# EAGLE board C9 (EAGLE 7.5.0)
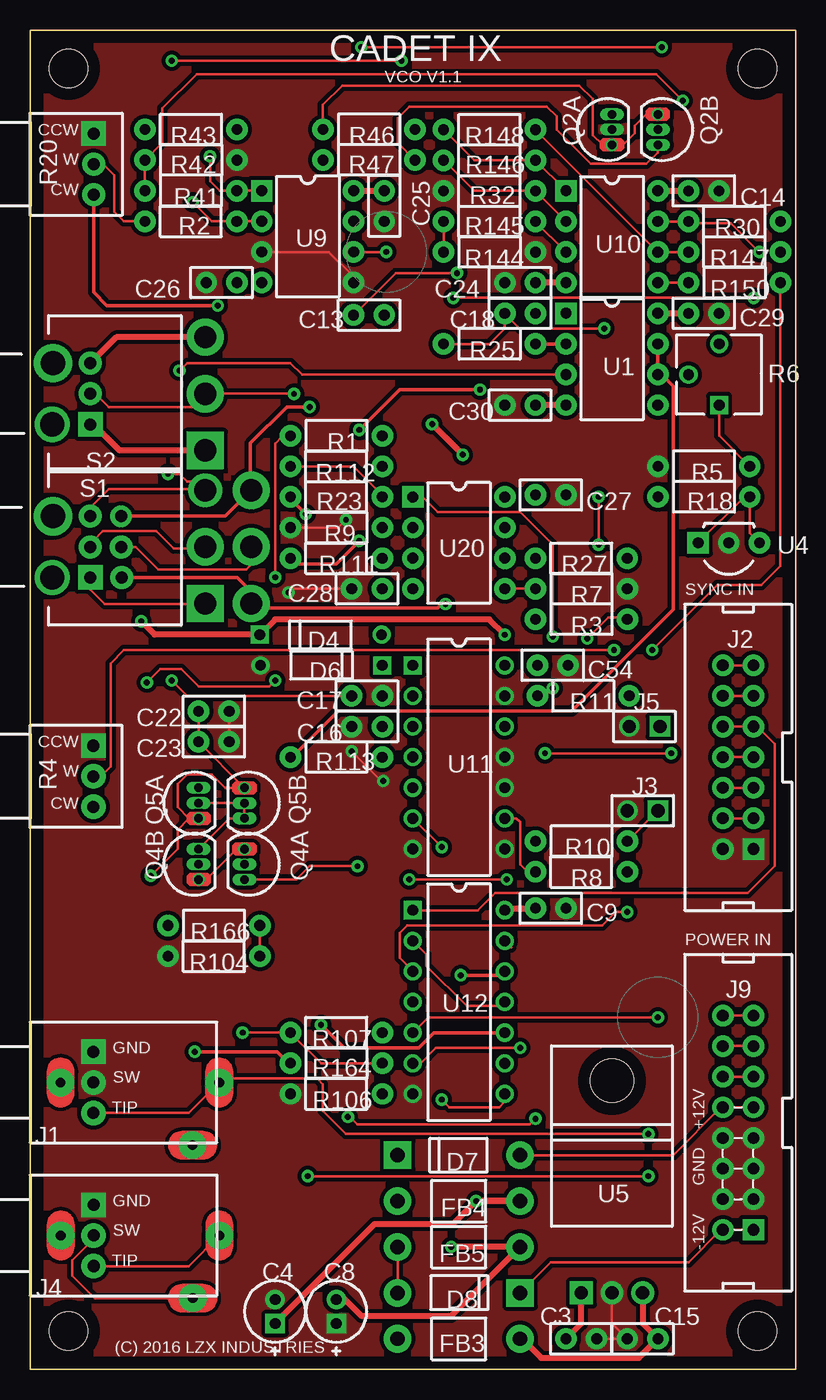
[diagram p0: board, top side]
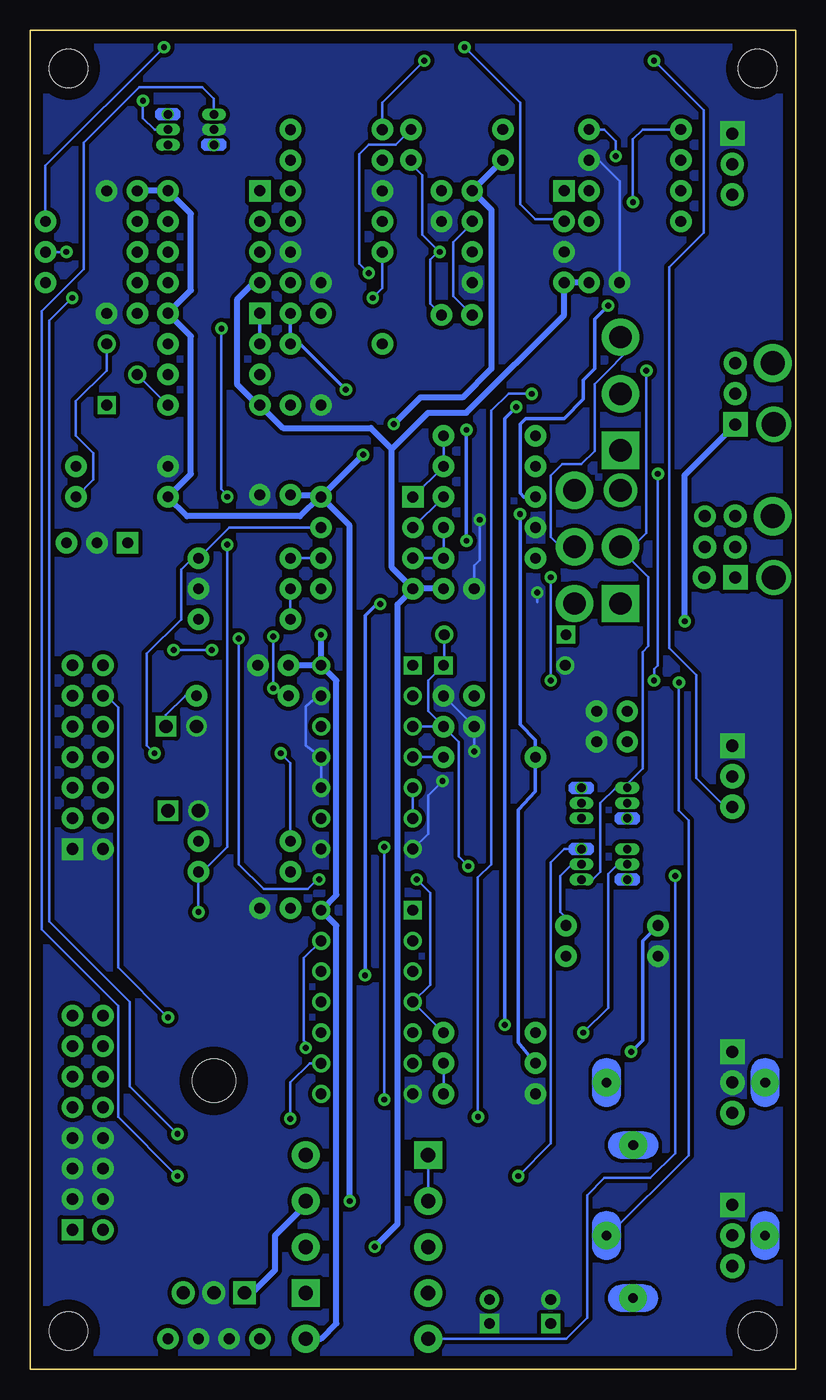
[diagram p1: board, bottom side, seen from below]

Size 63.5 x 111.12 mm. Coordinates in mm from the lower left corner, seen from the top.
Outline: 0,0 63.5,0 63.5,111.12 0,111.12 0,0
Copper layers (1*16): Top 0.035mm / dielectric 1.5mm / Bottom 0.035mm
Design rules "default *": minimum track width 10mil, minimum drill 0.61mm, track to track 8mil, track to pad 8mil, pad to pad 8mil, via to via 8mil, smd to smd 8mil, copper to edge 40mil, drill to drill 8mil, minimum pad ring 0mil, minimum via ring 8mil, stop-mask expansion 2mil, vias tented up to drill 19mil, thermal gap 10mil
Net classes: 0 Default: width 0.203 mm, clearance 0.229 mm, clearance 0.229 mm to class 1, clearance 0.229 mm to class 2; 1 Power Rails: width 0.508 mm, clearance 0.203 mm, clearance 0.203 mm to class 0, clearance 0.203 mm to class 2; 2 V Refs & Syncs: width 0.305 mm, clearance 0.229 mm, clearance 0.229 mm to class 0, clearance 0.229 mm to class 1
Holes 3.17 mm at 3.17,3.17 3.17,107.95 60.33,3.18 60.33,107.96

## Footprints (pad centres in the part's own frame; a part is rotated, then mirrored left to right if it is on the bottom)
CAP-2.54/6.6x3 = drill 0.889 pad 1.778: 1 -1.27,0; 2 1.27,0
CAPPR-2/5.08 = drill 0.9 pad 1.6 square: 1 -0.991,0 | drill 0.9 pad 1.6: 2 0.991,0
CAP-2.54/6.6x3_C9 = drill 0.889 pad 1.778: 1 -1.27,0; 2 1.27,0
CAP-2.54/6.6x3_C13 = drill 0.889 pad 1.778: 1 -1.27,0; 2 1.27,0
CAP-2.54/6.6x3_C14 = drill 0.889 pad 1.778: 1 -1.27,0; 2 1.27,0
CAP-2.54/6.6x3_C15 = drill 0.889 pad 1.778: 1 -1.27,0; 2 1.27,0
CAP-2.54/6.6x3_C16 = drill 0.889 pad 1.778: 1 -1.27,0; 2 1.27,0
CAP-2.54/6.6x3_C24 = drill 0.889 pad 1.778: 1 -1.27,0; 2 1.27,0
CAP-2.54/6.6x3_C25 = drill 0.889 pad 1.778: 1 -1.27,0; 2 1.27,0
CAP-2.54/6.6x3_C28 = drill 0.889 pad 1.778: 1 -1.27,0; 2 1.27,0
DO-35 = drill 0.9 pad 1.5 square: 1 -5.05,0 | drill 0.9 pad 1.5: 2 5.05,0
DO-35_D6 = drill 0.9 pad 1.5 square: 1 -5.05,0 | drill 0.9 pad 1.5: 2 5.05,0
DO-41 = drill 1.2 pad 2.286 square: 1 -5.08,0 | drill 1.2 pad 2.286: 2 5.08,0
DO-41_D8 = drill 1.2 pad 2.286 square: 1 -5.08,0 | drill 1.2 pad 2.286: 2 5.08,0
FB-10.16/4.45x3.5 = drill 1.194 pad 2.286: 1 -5.08,0; 2 5.08,0
PJ302M = drill 0.8 pad 2.286: 1A 2.54,0; 2A 13.487,-5.207; 3A 15.697,0 | drill 1 pad 2.032 square: 1B 5.258,2.54 | drill 1 pad 2.032: 2B 5.258,0; 3B 5.258,-2.54
IDC14M = drill 0.965 pad 1.778 square: 1 7.62,1.27 | drill 0.965 pad 1.778: 2 7.62,-1.27; 3 5.08,1.27; 4 5.08,-1.27; 5 2.54,1.27; 6 2.54,-1.27; 7 0,1.27; 8 0,-1.27; 9 -2.54,1.27; 10 -2.54,-1.27; 11 -5.08,1.27; 12 -5.08,-1.27; 13 -7.62,1.27; 14 -7.62,-1.27
HDR-2x1T/2.54x2.54/3x5 = drill 1.1 pad 1.7 square: 1 0,-1.27 | drill 1.1 pad 1.7: 2 0,1.27
PJ302M_J4 = drill 0.8 pad 2.286: 1A 2.54,0; 2A 13.487,-5.207; 3A 15.697,0 | drill 1 pad 2.032 square: 1B 5.258,2.54 | drill 1 pad 2.032: 2B 5.258,0; 3B 5.258,-2.54
IDC16M = drill 0.965 pad 1.778 square: 1 8.89,1.27 | drill 0.965 pad 1.778: 2 8.89,-1.27; 3 6.35,1.27; 4 6.35,-1.27; 5 3.81,1.27; 6 3.81,-1.27; 7 1.27,1.27; 8 1.27,-1.27; 9 -1.27,1.27; 10 -1.27,-1.27; 11 -3.81,1.27; 12 -3.81,-1.27; 13 -6.35,1.27; 14 -6.35,-1.27; 15 -8.89,1.27; 16 -8.89,-1.27
TO-92 = drill 0.7 pad 1: 1 -1.27,0 | drill 0.7 pad 1 long: 2 0,0; 3 1.27,0
TO-92_Q2B = drill 0.7 pad 1: 1 -1.27,0 | drill 0.7 pad 1 long: 2 0,0; 3 1.27,0
TO-92_Q5A = drill 0.7 pad 1: 1 -1.27,0 | drill 0.7 pad 1 long: 2 0,0; 3 1.27,0
TO-92_Q5B = drill 0.7 pad 1: 1 -1.27,0 | drill 0.7 pad 1 long: 2 0,0; 3 1.27,0
RES-7.62/5.1x2.5 = drill 0.889 pad 1.778: 1 -3.81,0; 2 3.81,0
RES-7.62/5.1x2.5_R2 = drill 0.889 pad 1.778: 1 -3.81,0; 2 3.81,0
ALPHA9H = drill 1 pad 2.032 square: 1 5.258,2.54 | drill 1 pad 2.032: 2 5.258,0; 3 5.258,-2.54
3362P = drill 0.9 pad 1.5 square: 1 -1.27,2.54 | drill 0.9 pad 1.5: 2 1.27,0; 3 -1.27,-2.54
ALPHA9H_R20 = drill 1 pad 2.032 square: 1 5.258,2.54 | drill 1 pad 1.905: 2 5.258,0; 3 5.258,-2.54
7201-A = drill 1.85 pad 3.1 square: 1 -4.7,-14.528 | drill 1 pad 2.032 square: 1B -2.54,-5 | drill 1.85 pad 3.1: 2 0,-14.528; 4 -4.7,-18.338; 5 0,-18.338; 6 4.7,-18.338 | drill 1 pad 1.905: 2B 0,-5; 3B 2.54,-5; 4B -2.54,-7.584; 5B 0,-7.54 | drill 1.85 pad 2.794: 3 4.7,-14.528 | drill 1 pad 1.778: 6B 2.54,-7.54 | drill 2 pad 3.175: 7 2.54,-1.894 | drill 2 pad 2.921: 8 -2.54,-1.828
7201-SPST = drill 1.85 pad 3.1 square: 1 -4.7,-14.528 | drill 1 pad 2.032 square: 1B -2.54,-5 | drill 1.85 pad 3.1: 2 0,-14.528; 3 4.7,-14.528 | drill 1 pad 1.905: 2B 0,-5; 3B 2.54,-5 | drill 2 pad 3.175: 7 2.54,-1.894 | drill 2 pad 2.921: 8 -2.54,-1.828
DIP-8 = drill 0.9 pad 1.778 square: 1 -3.81,3.81 | drill 0.9 pad 1.778: 2 -3.81,1.27; 3 -3.81,-1.27; 4 -3.81,-3.81; 5 3.81,-3.81; 6 3.81,-1.27; 7 3.81,1.27; 8 3.81,3.81
TO-92-100R = drill 0.889 pad 1.778 square: 1 2.54,0 | drill 0.889 pad 1.778: 2 0,0; 3 -2.54,0
TO-220H = drill 1.1 pad 1.9 square: 1 -2.54,0 | drill 1.1 pad 1.9: 2 0,0; 3 2.54,0 | hole 3.6: 0,17.6
DIP-8_U9 = drill 0.9 pad 1.778 square: 1 -3.81,3.81 | drill 0.9 pad 1.778: 2 -3.81,1.27; 3 -3.81,-1.27; 4 -3.81,-3.81; 5 3.81,-3.81; 6 3.81,-1.27; 7 3.81,1.27; 8 3.81,3.81
DIP-14 = drill 0.9 pad 1.5 square: 1 -3.81,7.62 | drill 0.9 pad 1.5: 2 -3.81,5.08; 3 -3.81,2.54; 4 -3.81,0; 5 -3.81,-2.54; 6 -3.81,-5.08; 7 -3.81,-7.62; 8 3.81,-7.62; 9 3.81,-5.08; 10 3.81,-2.54; 11 3.81,0; 12 3.81,2.54; 13 3.81,5.08; 14 3.81,7.62
DIP-14_U12 = drill 0.9 pad 1.5 square: 1 -3.81,7.62 | drill 0.9 pad 1.5: 2 -3.81,5.08; 3 -3.81,2.54; 4 -3.81,0; 5 -3.81,-2.54; 6 -3.81,-5.08; 7 -3.81,-7.62; 8 3.81,-7.62; 9 3.81,-5.08; 10 3.81,-2.54; 11 3.81,0; 12 3.81,2.54; 13 3.81,5.08; 14 3.81,7.62

## Placement (x,y rotation side)
C3  330n  [CAP-2.54/6.6x3]  45.72,2.54 0 top
C4  10u 25V  [CAPPR-2/5.08]  20.32,4.8 90 top
C8  10u 25V  [CAPPR-2/5.08]  25.4,4.8 90 top
C9  100n  [CAP-2.54/6.6x3_C9]  43.18,38.26 0 top
C13  100p  [CAP-2.54/6.6x3_C13]  28.1,87.48 180 top
C14  100n  [CAP-2.54/6.6x3_C14]  55.88,97.79 0 top
C15  100n  [CAP-2.54/6.6x3_C15]  50.8,2.54 180 top
C16  150pF  [CAP-2.54/6.6x3_C16]  27.94,53.34 0 top
C17  47nF  [CAP-2.54/6.6x3_C13]  27.94,55.88 180 top
C18  15pF  [CAP-2.54/6.6x3_C16]  40.64,87.63 0 top
C22  1uF  [CAP-2.54/6.6x3_C16]  15.24,54.61 0 top
C23  1000pF  [CAP-2.54/6.6x3_C16]  15.24,52.07 0 top
C24  100n  [CAP-2.54/6.6x3_C24]  40.64,90.17 0 top
C25  100n  [CAP-2.54/6.6x3_C25]  29.37,96.53 270 top
C26  100n  [CAP-2.54/6.6x3_C24]  15.88,90.18 0 top
C27  100n  [CAP-2.54/6.6x3_C14]  43.18,72.56 0 top
C28  100n  [CAP-2.54/6.6x3_C28]  27.94,64.77 0 top
C29  100n  [CAP-2.54/6.6x3_C14]  55.88,87.63 0 top
C30  100n  [CAP-2.54/6.6x3_C16]  40.64,80.01 0 top
C54  100n  [CAP-2.54/6.6x3_C14]  43.34,58.43 0 top
D4  1N4148  [DO-35]  24.1,60.96 0 top
D6  1N4148  [DO-35_D6]  24.16,58.42 180 top
D7  1N4001  [DO-41]  35.56,17.78 0 top
D8  1N4001  [DO-41_D8]  35.56,6.35 180 top
FB3  68R  [FB-10.16/4.45x3.5]  35.56,2.54 0 top
FB4  68R  [FB-10.16/4.45x3.5]  35.56,13.97 0 top
FB5  68R  [FB-10.16/4.45x3.5]  35.56,10.16 0 top
J1  PJ302M  [PJ302M]  -0.01,23.81 0 top
J2  LZXSYNC14  [IDC14M]  58.72,50.8 270 top
J3  90131-0121  [HDR-2x1T/2.54x2.54/3x5]  50.81,46.36 90 top
J4  PJ302M  [PJ302M_J4]  0,11.11 0 top
J5  90131-0121  [HDR-2x1T/2.54x2.54/3x5]  50.96,53.35 90 top
J9  2X8 PIN HEADER  [IDC16M]  58.72,20.47 270 top
Q2A  2N3904  [TO-92]  48.26,102.87 90 top
Q2B  2N3904  [TO-92_Q2B]  52.07,102.87 270 top
Q4A  2N3904  [TO-92_Q2B]  17.78,41.91 270 top
Q4B  2N3904  [TO-92]  13.97,41.91 90 top
Q5A  2N3906  [TO-92_Q5A]  13.97,46.99 90 top
Q5B  2N3906  [TO-92_Q5B]  17.78,46.99 270 top
R1  499R  [RES-7.62/5.1x2.5]  25.4,77.47 180 top
R2  16.5K  [RES-7.62/5.1x2.5_R2]  13.34,95.26 0 top
R3  4.02K  [RES-7.62/5.1x2.5]  45.72,62.24 180 top
R4  B10K  [ALPHA9H]  -0.01,49.21 0 top
R5  10K  [RES-7.62/5.1x2.5]  55.88,74.93 180 top
R6  10K  [3362P]  55.88,82.55 180 top
R7  1K  [RES-7.62/5.1x2.5]  45.72,64.78 180 top
R8  4.02K  [RES-7.62/5.1x2.5_R2]  45.73,41.28 0 top
R9  1K  [RES-7.62/5.1x2.5]  25.4,69.85 180 top
R10  499R  [RES-7.62/5.1x2.5]  45.72,43.82 180 top
R11  499R  [RES-7.62/5.1x2.5]  45.88,55.89 180 top
R18  4.99K  [RES-7.62/5.1x2.5]  55.88,72.39 180 top
R20  B10K  [ALPHA9H_R20]  0,100 0 top
R23  1K  [RES-7.62/5.1x2.5_R2]  25.4,72.39 0 top
R25  4.02K  [RES-7.62/5.1x2.5]  38.1,85.09 180 top
R27  1K  [RES-7.62/5.1x2.5_R2]  45.72,67.31 0 top
R30  16.5K  [RES-7.62/5.1x2.5_R2]  58.42,95.25 0 top
R32  1K  [RES-7.62/5.1x2.5_R2]  38.1,97.79 0 top
R41  100R  [RES-7.62/5.1x2.5]  13.34,97.8 180 top
R42  75R  [RES-7.62/5.1x2.5]  13.34,100.34 180 top
R43  2K TempCo 3300ppm  [RES-7.62/5.1x2.5_R2]  13.34,102.88 0 top
R46  8.25K  [RES-7.62/5.1x2.5]  28.1,102.88 180 top
R47  1.2M  [RES-7.62/5.1x2.5]  28.1,100.34 180 top
R104  1K  [RES-7.62/5.1x2.5_R2]  15.24,34.29 0 top
R106  2.05K  [RES-7.62/5.1x2.5_R2]  25.4,22.86 0 top
R107  49.9K  [RES-7.62/5.1x2.5_R2]  25.4,27.94 0 top
R111  1K  [RES-7.62/5.1x2.5_R2]  25.4,67.31 0 top
R112  1K  [RES-7.62/5.1x2.5_R2]  25.4,74.93 0 top
R113  75R  [RES-7.62/5.1x2.5]  25.4,50.8 180 top
R144  100K  [RES-7.62/5.1x2.5]  38.1,92.71 180 top
R145  499R  [RES-7.62/5.1x2.5_R2]  38.1,95.25 0 top
R146  1K  [RES-7.62/5.1x2.5_R2]  38.1,100.33 0 top
R147  4.99K  [RES-7.62/5.1x2.5_R2]  58.42,92.71 0 top
R148  4.99K  [RES-7.62/5.1x2.5_R2]  38.1,102.87 0 top
R150  499R  [RES-7.62/5.1x2.5]  58.42,90.17 180 top
R164  2.21K  [RES-7.62/5.1x2.5]  25.4,25.4 180 top
R166  1K  [RES-7.62/5.1x2.5]  15.24,36.83 180 top
S1  7201MD9ABE  [7201-A]  0,68.25 90 top
S2  10TF230-DIY  [7201-SPST]  0,80.95 90 top
U1  TL072P  [DIP-8]  48.26,83.82 0 top
U4  TL431  [TO-92-100R]  57.95,68.59 180 top
U5  7805  [TO-220H]  48.26,6.35 0 top
U9  TL072  [DIP-8_U9]  23.02,93.99 0 top
U10  LM6172  [DIP-8]  48.26,93.98 0 top
U11  CD4066BCN  [DIP-14]  35.56,50.8 0 top
U12  74HC14  [DIP-14_U12]  35.56,30.48 0 top
U20  LM6172  [DIP-8]  35.56,68.58 0 top

## Library data of the parts
C3 C4 C8 C9 C13-C18 C22-C30 C54 D7 D8 J2 J9 Q2A Q2B Q4A Q4B Q5A Q5B R1-R3 R5 R7-R11 R18 R23 R25 R27 R30 R32 R41-R43 R46 R47 R104 R106 R107 R111-R113 R144-R148 R150 R164 R166 S2 = common
D4 D6 = common; DATASHEET: http://datasheets.diptrace.com\fairchild\1N4148.pdf; MANUFACTURER: Fairchild
FB3-FB5 = common; MANUFACTURER: Fair-Rite
J1 J4 = common; DATASHEET: http://www.thonk.co.uk/shop/pj302m/
J3 J5 = common; DATASHEET: http://datasheets.diptrace.com/con_headers/901310126_sd.pdf; MANUFACTURER: Molex
R4 R20 = common; DATASHEET: http://www.thonk.co.uk/shop/alpha-9mm-pots/; MANUFACTURER: Alpha
R6 = common; DATASHEET: http://datasheets.diptrace.com/potentiometers/bourns_trimpot_catalog.pdf; MANUFACTURER: Bourns
S1 = common; DATASHEET: http://datasheets.diptrace.com/switches/7000_series.pdf; MANUFACTURER: C&K
U1 = common; DATASHEET: http://datasheets.diptrace.com\ti\TL07x.pdf; MANUFACTURER: Texas Instruments
U4 = common; DATASHEET: http://datasheets.diptrace.com\st_micro\CD00000986.pdf; MANUFACTURER: ST Microelectronics
U5 = common; MANUFACTURER: Atmel
U9 U10 U20 = common; DATASHEET: http://www.ti.com/lit/gpn/lm6172; MANUFACTURER: Texas Instruments
U11 = common; DATASHEET: http://datasheets.diptrace.com/fairchild/CD4066BC.pdf; MANUFACTURER: Fairchild
U12 = common; MANUFACTURER: National Semiconductor

## Nets
0V: C3.2 C4.2 C8.1 C9.2 C14.2 C15.2 C16.1 C17.1 C22.2 C23.2 C24.1 C25.2 C26.1 C27.2 C28.1 C29.2 C30.1 C54.2 D6.2 J1.1A J1.1B J1.2A J1.2B J2.1 J2.2 J3.2 J4.1A J4.1B J5.2 J9.3 J9.4 J9.5 J9.6 J9.7 J9.8 Q2A.2 R4.1 R5.2 R7.1 R9.2 R20.1 R32.1 R42.1 R104.1 R106.1 R144.1 U4.2 U5.2 U9.3 U9.5 U11.7 U11.8 U11.10 U11.11 U11.13 U12.7
2V_REF [V Refs & Syncs]: R20.3 R23.1 R113.2 R164.2 R166.2 U1.6 U1.7
+5V [Power Rails]: C9.1 C15.1 C54.1 D4.1 FB3.2 S2.1 S2.1B U5.3 U11.14 U12.14
+12V [Power Rails]: C3.1 C4.1 C14.1 C25.1 C27.1 C29.1 FB4.2 R18.2 R47.2 U1.8 U5.1 U9.8 U10.8 U20.8
-12V [Power Rails]: C8.2 C24.2 C26.2 C28.2 C30.2 FB5.2 U1.4 U9.4 U10.4 U20.4
_HSYNC [V Refs & Syncs]: S1.4 S1.4B U12.12
_VSYNC [V Refs & Syncs]: S1.6 S1.6B U12.10
EXPO_CONVERTER_OUT: Q2A.3 Q4A.1 Q4B.1
Net_0: J4.3A J4.3B R1.2
Net_1: R6.3 R18.1 U4.1 U4.3
Net_2: U12.6 U12.13
Net_3: R2.1 R20.2
Net_4: J2.11 J2.12 U12.5
Net_5: R9.1 R111.2 U20.3
Net_6: R8.1 U11.9
Net_7: R3.2 R7.2 U20.5
Net_8: J3.1 R10.1
Net_9: R4.2 R150.1
Net_10: S1.1 S1.1B
Net_11: J9.11 J9.12
Net_12: R4.3 R146.2 R148.1 U10.1
Net_13: D8.2 FB5.1
Net_14: J9.15 J9.16
Net_15: J2.7 J2.8
Net_16: R5.1 R6.1
Net_17: D7.1 FB4.1
Net_18: D8.1 J9.1 J9.2
Net_19: R10.2 R27.2 U20.7
Net_20: D7.2 J9.9 J9.10
Net_21: R6.2 U1.5
Net_36: J5.1 R11.1
Net_39: C13.1 Q2B.3 R47.1 U9.6
Net_45: Q2A.1 Q2B.1 R46.2
Net_46: R2.2 R30.2 R43.1 U9.2
Net_48: R41.1 R43.2 U9.1
Net_49: Q2B.2 R41.2 R42.2
Net_51: C13.2 R46.1 U9.7
Net_56: J2.9 J2.10 U12.1
Net_57: J4.2A J4.2B
Net_58: U12.2 U12.11
Net_59: C17.2 S1.3 S1.3B
Net_60: J9.13 J9.14
Net_61: S1.5 S1.5B S2.3 S2.3B
Net_62: U11.5 U11.6 U12.8
Net_63: J2.13 J2.14
Net_64: J2.5 J2.6
Net_65: J2.3 J2.4
Net_72: R145.2 U10.3
Net_79: Q4B.3 Q5A.2 Q5B.2 Q5B.3
Net_81: Q4A.2 R104.2 R166.1
Net_83: J1.3A J1.3B R144.2 R145.1
Net_85: Q4B.2 R106.2 R107.1 R164.1
Net_101: R23.2 R112.1 U20.2
Net_103: C22.1 C23.1 FB3.1 Q5A.1 Q5B.1
Net_110: R150.2 U10.5
Net_114: R32.2 R146.1 U10.2
Net_126: R147.1 R148.2 U10.6
Net_178: R27.1 U20.6
PROCESSOR_IN: R1.1 R11.2 R112.2 U20.1
SYNC_SELECT: S2.2 S2.2B U12.9
SYNC_SWITCH_REFERENCE: R113.1 U11.4
U7_+IN: C18.1 R8.2 R25.2 U12.3
VC_FM: R30.1 R147.2 U10.7
VCO_CORE_BUFFERED [V Refs & Syncs]: C18.2 R25.1 R111.1 U1.1 U1.2
VCO_CORE_SQUARE: R3.1 R107.2 U12.4
VCO_CORE_UNBUFFERED: C16.2 D4.2 D6.1 Q4A.3 Q5A.3 S1.2 S1.2B U1.3 U11.3

## Tracks (layer width: path | path; a pad name or v marks a point on that pad's centre or on a via)
0V  (via drill 0.49 pad 1.02)
  Top 0.203: U9.3 24.77,92.72 26.83,90.66 U9.5 | C3.2 C15.2 48.26,3.81 U5.2 | C3.2 | C22.2 C23.2 | v29.29,48.82 29.21,48.74 v26.67,51.28 | R9.2 25.55,69.85 v26.2,70.49 | C28.1 21.74,64.77 v21.43,64.46
  Bottom 0.203: C26.1 14.61,98.59 16.35,100.34 R42.1 | C17.1 C16.1 | C16.1 | U11.10 U11.11 40.64,51.75 40.64,55 39.37,56.11 U11.13 | U11.7 30.48,44.45 30.48,47.63 v29.29,48.82 | v26.67,51.28 C16.1 | v26.2,70.49 26.2,67.16 26.67,66.68 C28.1 | v21.43,64.46 21.43,63.66
  pour Top (isolate 0.33): 0.83,0.83 62.67,0.83 62.67,110.3 0.83,110.3
  pour Bottom (isolate 0.33): 0.83,0.83 62.67,0.83 62.67,110.3 0.83,110.3
2V_REF  (via drill 0.49 pad 1.02)
  Top 0.305: U1.7 U1.6 51.44,82.55 51.6,82.72 52.23,82.72 53.35,81.61 53.35,63.03 44.92,54.61 25.56,54.61 21.59,50.64 R113.2 20.95,50.8 | R164.2 21.59,25.25 20.48,26.36 v13.65,26.36 | R23.1 21.44,72.39 v22.86,70.97 | R20.3 5.26,89.37 6.35,88.27 v15.56,88.27
  Bottom 0.305: v13.65,26.36 12.7,27.31 12.7,35.56 R166.2 | R164.2 23.02,27.15 23.02,46.41 21.59,47.94 R113.2 21.59,52.23 22.86,53.5 v22.86,70.97 | v15.56,88.27 16.67,87.16 16.67,83.03 17.62,82.08 17.62,80.5 19.21,78.91 22.39,78.91 22.86,78.43 22.86,72.72 22.54,72.39 R23.1
+5V  (via drill 0.49 pad 1.02)
  Top 0.508: U5.3 50.8,3.81 C15.1 50.48,0.95 42.39,0.95 40.8,2.54 FB3.2 | U12.14 39.53,38.26 C9.1 | v39.37,60.96 38.1,62.23 20.32,62.23 D4.1 10.33,60.96 v9.21,62.08 | S2.1 7.42,76.25 5.72,77.95 5.72,79.12 S2.1B
  Bottom 0.508: U11.14 C54.1 | FB3.2 39.37,2.54 38.1,3.81 38.1,36.83 U12.14 38.1,39.37 38.1,57.15 U11.14 | U11.14 v39.37,60.96 | v9.21,62.08 9.21,74.2 S2.1B
+12V  (via drill 0.49 pad 1.02)
  Top 0.508: U10.8 C14.1 | C14.1 | U1.8 C29.1 | C29.1 | C3.1 45.72,3.81 U5.1 | C4.1 28.57,12.06 35.09,12.06 v36.99,13.97 FB4.2 v36.99,13.97 | v33.34,78.43 v35.88,75.89 | v35.88,75.89 | U9.8 C25.1 | C25.1
  Bottom 0.508: C27.1 39.37,72.56 U20.8 | v36.99,13.97 36.99,70.01 U20.8 | U20.8 39.21,72.39 | C14.1 U10.8 50.17,95.89 50.17,89.53 U1.8 50.16,85.72 50.16,74.3 R18.2 50.48,70.8 41.12,70.8 39.53,72.39 U20.8 | C14.1 | 23.97,100.34 R47.2 U9.8 25.24,96.21 25.24,83.03 27.63,80.64 31.13,80.64 v33.34,78.43 | U5.1 45.09,6.35 43.18,8.26 43.18,11.11 40.32,13.97 FB4.2 | v35.88,75.89 39.37,72.4 U20.8 | 42.07,72.56 C27.1 | C27.1
-12V  (via drill 0.49 pad 1.02)
  Top 0.508: U10.4 C24.2 | C24.2 | U1.4 C30.2 | C30.2 | C8.2 25.56,5.79 25.56,6.35 27.47,4.45 34.92,4.45 FB5.2 v34.92,10.16
  Bottom 0.508: C28.2 U20.4 | U20.4 | C26.2 U9.4 19.21,87.48 27.32,79.38 30.49,79.38 33.5,76.37 | v34.92,10.16 33.02,12.06 33.02,63.5 U20.4 | U20.4 33.5,66.52 33.5,76.37 | U10.4 44.94,90.17 46.36,88.75 46.36,81.76 44.6,80.01 U1.4 42.55,78.11 35.24,78.11 33.5,76.37
_HSYNC  (via drill 0.49 pad 1.02)
  Top 0.305: S1.4B 17.17,65.71 18.34,64.54 S1.4 18.7,63.19 33.82,63.19 34.13,63.51 v34.45,63.51 | U12.12 39.37,32.7 v35.72,32.7
  Bottom 0.305: v35.72,32.7 35.72,62.55 34.77,63.51 v34.45,63.51
_VSYNC  (via drill 0.49 pad 1.02)
  Top 0.305: S1.6B 16.18,70.79 S1.6 18.26,72.95 18.26,76.84 21.27,79.86 v23.18,79.86 | v24.13,28.58 26.04,26.67 32.23,26.67 33.5,27.94 U12.10
  Bottom 0.305: v23.18,79.86 24.13,78.91 v24.13,28.58
EXPO_CONVERTER_OUT  (via drill 0.49 pad 1.02)
  Top 0.203: Q4B.1 14.61,40.64 17.14,43.18 Q4A.1 | v23.02,16.04 v51.28,16.04
  Bottom 0.203: Q4A.1 19.21,43.18 20.32,42.07 20.32,18.73 v23.02,16.04 | v51.28,16.04 56.2,20.96 56.2,30.17 62.55,36.52 62.55,87.8 59.06,91.29 59.06,101.77 54.46,106.37 49.22,106.37 48.26,105.42 Q2A.3
Net_0  (via drill 0.49 pad 1.02)
  Top 0.203: J4.3B 13.16,8.57 J4.3A | v9.69,57 10.8,58.11 12.54,58.11 13.97,56.68 19.85,56.68 v20.32,57.16 | v20.32,65.73 20.32,76.84 20.95,77.47 R1.2
  Bottom 0.203: J4.3A 15.56,11.11 8.89,17.78 8.89,45.56 9.69,46.36 v9.69,57 | v20.32,57.16 v20.32,65.73
Net_1
  Top 0.203: U4.1 59.21,72.39 R18.1 59.69,69.39 U4.3
  Bottom 0.203: R6.3 57.15,82.88 59.7,80.34 59.7,77.48 58.27,76.05 58.27,73.81 R18.1
Net_2  (via drill 0.49 pad 1.02)
  Top 0.203: U12.13 39.91,35.02 | U12.6 32.39,25.4 33.66,26.67 v40.64,26.67
  Bottom 0.203: v40.64,26.67 40.64,27.15 40.8,27.31 40.8,34.13 U12.13
Net_3
  Top 0.203: R20.2 5.26,100.02 6.03,100.02 6.99,99.07 6.99,96.05 7.78,95.26 R2.1
Net_4  (via drill 0.49 pad 1.02)
  Top 0.203: J2.12 J2.11 | v52.07,29.21 33.02,29.21 U12.5 | v52.07,29.21
  Bottom 0.203: J2.12 57.15,55.88 56.2,54.93 56.2,33.34 v52.07,29.21
Net_5
  Bottom 0.203: R9.1 R111.2 U20.3 | U20.3
Net_6
  Top 0.203: U11.9 40.33,45.72 40.64,45.41 40.64,41.91 41.28,41.28 R8.1
Net_7
  Top 0.203: U20.5 R7.2
  Bottom 0.203: R7.2 R3.2
Net_8
  Top 0.203: J3.1 | J3.1 R10.1
Net_9  (via drill 0.49 pad 1.02)
  Top 0.203: R4.2 5.87,49.21 6.67,50.01 6.67,58.58 7.79,59.7 v48.42,59.7 | v51.6,59.7 57,65.09 60.65,65.09 62.23,66.67 R150.1
  Bottom 0.203: v48.42,59.7 v51.6,59.7
Net_10
  Top 0.203: S1.1B 5,64.7 6.19,63.51 14.48,63.51 S1.1
Net_11
  Top 0.203: J9.12 J9.11
Net_12  (via drill 0.49 pad 1.02)
  Top 0.203: U10.1 R146.2 36.83,100.33 R148.1 | U10.1 | v11.75,108.6 v30.8,108.6
  Bottom 0.203: R4.3 5.86,46.67 8.26,49.06 8.26,57.63 10.48,59.85 10.48,91.45 7.62,94.31 7.62,104.47 v11.75,108.6 | v30.8,108.6 34.29,105.11 R148.1
Net_13
  Top 0.203: FB5.1 D8.2
Net_14
  Top 0.203: J9.16 J9.15
Net_15
  Top 0.203: J2.8 J2.7
Net_16
  Top 0.203: R6.1 57.15,77.47 R5.1
Net_17
  Bottom 0.203: D7.1 FB4.1
Net_18
  Top 0.203: J9.1 J9.2 57.3,11.58 54.61,8.89 43.18,8.89 D8.1
Net_19  (via drill 0.49 pad 1.02)
  Top 0.203: v53.19,51.12 v42.71,51.12
  Bottom 0.203: U20.7 46.99,69.85 R27.2 50.02,67.31 50.96,66.36 50.96,62.24 53.82,59.38 53.82,51.76 v53.19,51.12 | v42.71,51.12 41.91,50.33 R10.2
Net_20
  Top 0.203: J9.9 J9.10 57.3,21.74 53.34,17.78 D7.2
Net_21
  Bottom 0.203: U1.5 R6.2 | R6.2
Net_36
  Bottom 0.203: R11.1 50.65,55.89 52.23,54.3 J5.1
Net_39  (via drill 0.49 pad 1.02)
  Top 0.203: 52.1,101.47 | 52.1,101.47 Q2B.3 | Q2B.3 | U9.6 v29.53,92.72 | Q2B.3 52.07,100.97 51.12,100.02 46.52,100.02 43.66,102.88 43.66,103.99 42.87,104.79 31.44,104.79 30.48,103.83 30.48,101.77 R47.1
  Bottom 0.203: R47.1 32.23,100.34 30.96,99.07 30.96,94.15 v29.53,92.72 29.69,92.72 30.32,92.08 30.32,88.43 C13.1 | R47.1
Net_45
  Top 0.203: Q2B.1 51.11,104.14 50.17,103.2 50.17,102.56 49.21,101.6 Q2A.1 47.48,101.6 46.68,102.4 46.68,105.42 45.57,106.53 25.88,106.53 24.29,104.94 R46.2
Net_46  (via drill 0.49 pad 1.02)
  Top 0.203: 17.94,95.26 R2.2 15.08,95.26 v13.49,96.85 | 17.94,95.26 | 17.94,95.26 U9.2 | v52.39,109.71 v27.47,109.71
  Bottom 0.203: v13.49,96.85 13.49,102.09 12.7,102.88 R43.1 | R30.2 62.23,99.87 v52.39,109.71 | v27.47,109.71 22.86,105.1 22.86,96.69 21.59,95.42 19.37,95.42 U9.2
Net_48  (via drill 0.49 pad 1.02)
  Top 0.203: R41.1 17.94,97.8 | 17.94,97.8 | 17.94,97.8 U9.1 15.72,97.8 14.92,98.59 v14.92,100.66
  Bottom 0.203: R43.2 15.88,102.88 14.92,101.93 v14.92,100.66
Net_49  (via drill 0.49 pad 1.02)
  Top 0.203: R41.2 R42.2 10.96,101.77 10.96,104.63 13.81,107.48 51.92,107.48 v54.14,105.26
  Bottom 0.203: v54.14,105.26 54.14,103.83 53.18,102.87 Q2B.2
Net_51  (via drill 0.49 pad 1.02)
  Top 0.203: C13.2 | C13.2 30.32,90.97 v35.41,90.97
  Bottom 0.203: U9.7 26.83,95.1 28.42,93.51 28.42,89.07 26.99,87.64 26.99,87.48 C13.2 | v35.41,90.97 36.2,91.77 36.2,100.82 35.41,101.61 33.18,101.61 R46.1
Net_56
  Top 0.203: J2.10 J2.9 60.33,53.34 61.76,51.91 61.76,41.76 59.54,39.53 38.58,39.53 37.15,38.1 U12.1
Net_57
  Top 0.203: J4.2A 5.37,5.91 3.49,7.78 3.49,9.05 5.24,10.79 5.58,10.79 J4.2B
Net_58
  Top 0.203: U12.2 32.86,34.45 32.86,33.5 36.2,30.16 39.05,30.16 U12.11
Net_59  (via drill 0.49 pad 1.02)
  Top 0.203: S1.3B 4.92,70.79 4.92,71.44 6.51,73.03 14.53,73.03 S1.3 14.53,73.67 13.02,73.67 12.38,74.3 v11.43,74.3 | C17.2 13.02,55.88 v11.75,57.15
  Bottom 0.203: v11.75,57.15 11.75,58.1 11.43,58.42 v11.43,74.3
Net_60
  Top 0.203: J9.14 J9.13
Net_61
  Top 0.203: S1.5 18.34,66.76 17.94,66.36 10.64,66.36 8.75,68.25 S1.5B
  Top 0.508: S2.3 7.16,85.65 S2.3B
  Bottom 0.203: S2.3 14.53,85.26 13.18,85.26 16.67,81.77 16.67,76.21 17.78,75.1 19.37,75.1 20.32,74.14 20.32,69.06 19.53,68.27 18.36,68.27 S1.5
Net_62  (via drill 0.49 pad 1.02)
  Top 0.203: U12.8 39.37,22.22 38.9,21.75 34.77,21.75 v34.13,22.39 | v34.13,43.34 U11.6
  Bottom 0.203: U11.5 U11.6 | v34.13,22.39 v34.13,43.34
Net_63
  Top 0.203: J2.14 J2.13
Net_64
  Top 0.203: J2.6 J2.5
Net_65
  Top 0.203: J2.4 J2.3
Net_72
  Top 0.203: R145.2 U10.3 | U10.3
Net_79
  Top 0.203: Q5A.2 Q5B.2 | Q5B.2 | Q5B.2 Q5B.3 16.51,45.72 Q4B.3
Net_81
  Top 0.203: R166.1 R104.2
  Bottom 0.203: Q4A.2 18.58,41.91 19.53,40.96 19.53,37.95 18.41,36.83 R166.1
Net_83  (via drill 0.49 pad 1.02)
  Top 0.203: R145.1 R144.2 | J1.3B 13.15,21.27 J1.3A 15.69,24.13 23.82,24.13 24.29,23.66 24.29,21.43 26.2,19.53 v51.28,19.53 | v60.01,88.91 v35.09,88.91
  Bottom 0.203: v51.28,19.53 55.25,23.5 55.25,30.48 61.92,37.15 61.92,87 v60.01,88.91 | v35.09,88.91 34.29,89.71 R144.2
Net_85  (via drill 0.49 pad 1.02)
  Top 0.203: R164.1 24.13,25.4 R107.1 v17.62,27.94
  Bottom 0.203: R106.2 R164.1 | Q4B.2 14.77,41.91 15.56,41.12 15.56,30.01 v17.62,27.94
Net_101
  Top 0.203: R112.1 26.83,74.93 29.37,72.39 R23.2
  Bottom 0.203: R23.2 U20.2 | U20.2
Net_103  (via drill 0.49 pad 1.02)
  Top 0.203: C22.1 C23.1 Q5B.1 16.2,48.26 15.08,49.38 13.02,49.38 12.22,48.58 12.22,46.67 13.18,45.72 | v10,40.96 12.22,43.18 12.22,44.77 13.18,45.72 | 13.18,45.72 Q5A.1 13.18,45.72
  Bottom 0.203: FB3.1 19.05,2.54 17.3,4.29 17.3,14.45 15.88,15.88 12.06,15.88 10,17.94 v10,40.96
Net_110
  Top 0.203: U10.5 R150.2
Net_114
  Top 0.203: U10.2 R32.2 36.83,97.79 R146.1 | U10.2
Net_126
  Top 0.203: R147.1 U10.6 | U10.6 | R148.2 U10.6 | U10.6
Net_178
  Bottom 0.203: U20.6 R27.1 | R27.1
PROCESSOR_IN  (via drill 0.49 pad 1.02)
  Top 0.203: U20.1 32.55,72.39 33.82,71.13 40.64,71.13 43.34,68.43 v43.34,60.81 | v43.34,56.52 42.71,55.89 R11.2
  Bottom 0.203: R1.1 R112.2 U20.1 | U20.1 | v43.34,60.81 v43.34,56.52
SYNC_SELECT  (via drill 0.49 pad 1.02)
  Top 0.203: S2.2B 5,81.37 6.51,79.86 14.53,79.86 S2.2 v21.89,80.95 | v26.36,20.96 26.51,20.96 27.15,20.32 41.44,20.32 v41.91,20.8
  Bottom 0.203: v21.89,80.95 21.91,80.97 23.82,80.97 25.24,79.54 25.24,41.91 26.36,40.8 v26.36,20.96 | v41.91,20.8 41.91,23.82 40.33,25.4 U12.9
SYNC_SWITCH_REFERENCE
  Bottom 0.203: R113.1 U11.4 | U11.4
U7_+IN  (via drill 0.49 pad 1.02)
  Top 0.203: R25.2 38.1,85.09 39.37,86.36 C18.1 40.63,86.37 v47.63,86.37 | v47.15,68.43 v47.15,72.4 | v49.53,37.95 48.58,37.95 47.47,36.83 31.27,36.83 30.64,36.2 30.64,34.13 U12.3
  Bottom 0.203: v47.15,68.43 47.15,43.34 49.53,40.96 R8.2 v49.53,37.95 | v47.15,72.4 46.99,72.4 47.63,73.03 v47.63,86.37
VC_FM  (via drill 0.49 pad 1.02)
  Top 0.203: U10.7 R30.1 | R30.1 | R30.1 54.61,95.09 58.12,95.09 v60.49,92.72
  Bottom 0.203: v60.49,92.72 R147.2
VCO_CORE_BUFFERED  (via drill 0.49 pad 1.02)
  Top 0.305: R25.1 U1.2 | U1.2 | v37.31,81.29 30.64,81.29 v27.31,77.95 | v27.31,68.75 25.4,66.84 21.59,66.84 R111.1
  Bottom 0.305: C18.2 R25.1 41.91,85.89 v37.31,81.29 | U1.2 U1.1 | v27.31,77.95 v27.31,68.75
VCO_CORE_SQUARE  (via drill 0.49 pad 1.02)
  Top 0.203: v31.44,40.64 v39.53,40.64 | v46.2,60.65 47.95,62.4 49.38,62.4 R3.1
  Bottom 0.203: R107.2 U12.4 30.32,31.91 30.32,39.53 v31.44,40.64 | v39.53,40.64 39.53,40.8 40.49,39.85 44.14,39.85 46.2,41.91 v46.2,60.65
VCO_CORE_UNBUFFERED  (via drill 0.49 pad 1.02)
  Top 0.203: S1.2 15.26,68.25 15.4,68.11 11.91,68.11 10.48,69.54 6.03,69.54 5.24,68.75 5.24,68.49 S1.2B | Q4A.3 22.06,40.64 23.18,41.76 v27.15,41.76 | U1.3 22.55,82.55 21.59,83.51 13.02,83.51 v12.38,82.88
  Bottom 0.203: U11.3 C16.2 | C16.2 | C16.2 30.48,54.61 30.48,57.15 D6.1 29.15,58.48 D4.2 | Q4A.3 16.83,40.64 16.19,41.27 16.19,46.99 14.92,48.26 Q5A.3 14.29,48.26 12.7,49.85 12.7,59.53 12.22,60.01 12.22,65.73 13.97,67.48 14.53,67.48 S1.2 14.11,68.25 13.81,67.95 12.38,69.38 v12.38,82.88 | v27.15,41.76 27.94,42.55 27.94,52.07 C16.2

## Text on the board
tPlace: CADET IX | VCO V1.1 | CCW | R43 | R46 | R148 | Q2A | Q2B | W | R42 | R47 | R146 | CW | R20 | R41 | R32 | C14 | C25 | R2 | R145 | R30 | U9 | U10 | R144 | R147 | C26 | C24 | R150 | C29 | C13 | C18 | R25 | U1 | R6 | C30 | R1 | S2 | R112 | R5 | S1 | R23 | C27 | R18 | R9 | U4 | U20 | R111 | R27 | SYNC IN | C28 | R7 | R3 | D4 | J2 | D6 | C54 | C17 | R11 | J5 | CCW | C22 | C16 | C23 | W | R113 | U11 | R4 | J3 | CW | Q5A | Q5B | R10 | Q4B | Q4A | R8 | C9 | R166 | POWER IN | R104 | J9 | U12 | GND | R107 | SW | R164 | TIP | R106 | +12V | J1 | D7 | GND | GND | U5 | FB4 | SW | TIP | -12V | FB5 | C4 | C8 | J4 | D8 | C3 | C15 | (C) 2016 LZX INDUSTRIES | FB3
tDocu: R43 | R46 | R148 | Q2A | Q2B | R42 | R47 | R146 | R20 | R41 | R32 | C14 | C25 | R2 | R145 | R30 | U9 | U10 | R144 | R147 | C26 | C24 | R150 | C29 | C13 | C18 | R25 | U1 | R6 | C30 | R1 | S2 | R112 | R5 | S1 | R23 | C27 | R18 | R9 | U4 | U20 | R111 | R27 | C28 | R7 | R3 | D4 | J2 | D6 | C54 | C17 | R11 | J5 | C22 | C16 | C23 | R113 | U11 | R4 | J3 | Q5A | Q5B | R10 | Q4B | Q4A | R8 | C9 | R166 | R104 | J9 | U12 | R107 | R164 | R106 | J1 | D7 | U5 | FB4 | FB5 | C4 | C8 | J4 | D8 | C3 | C15 | FB3